# Altium PCB Pet_Feeder_PCB.PcbDoc (part 1 of 3)
Units mil, origin at the board's own origin, x right, y up, seen from the top; angles counter-clockwise.
Board outline 3600 x 2700 mil, 2 copper layers (Top Layer, Bottom Layer); 99 components, 71 nets, 320 pads, 396 vias.
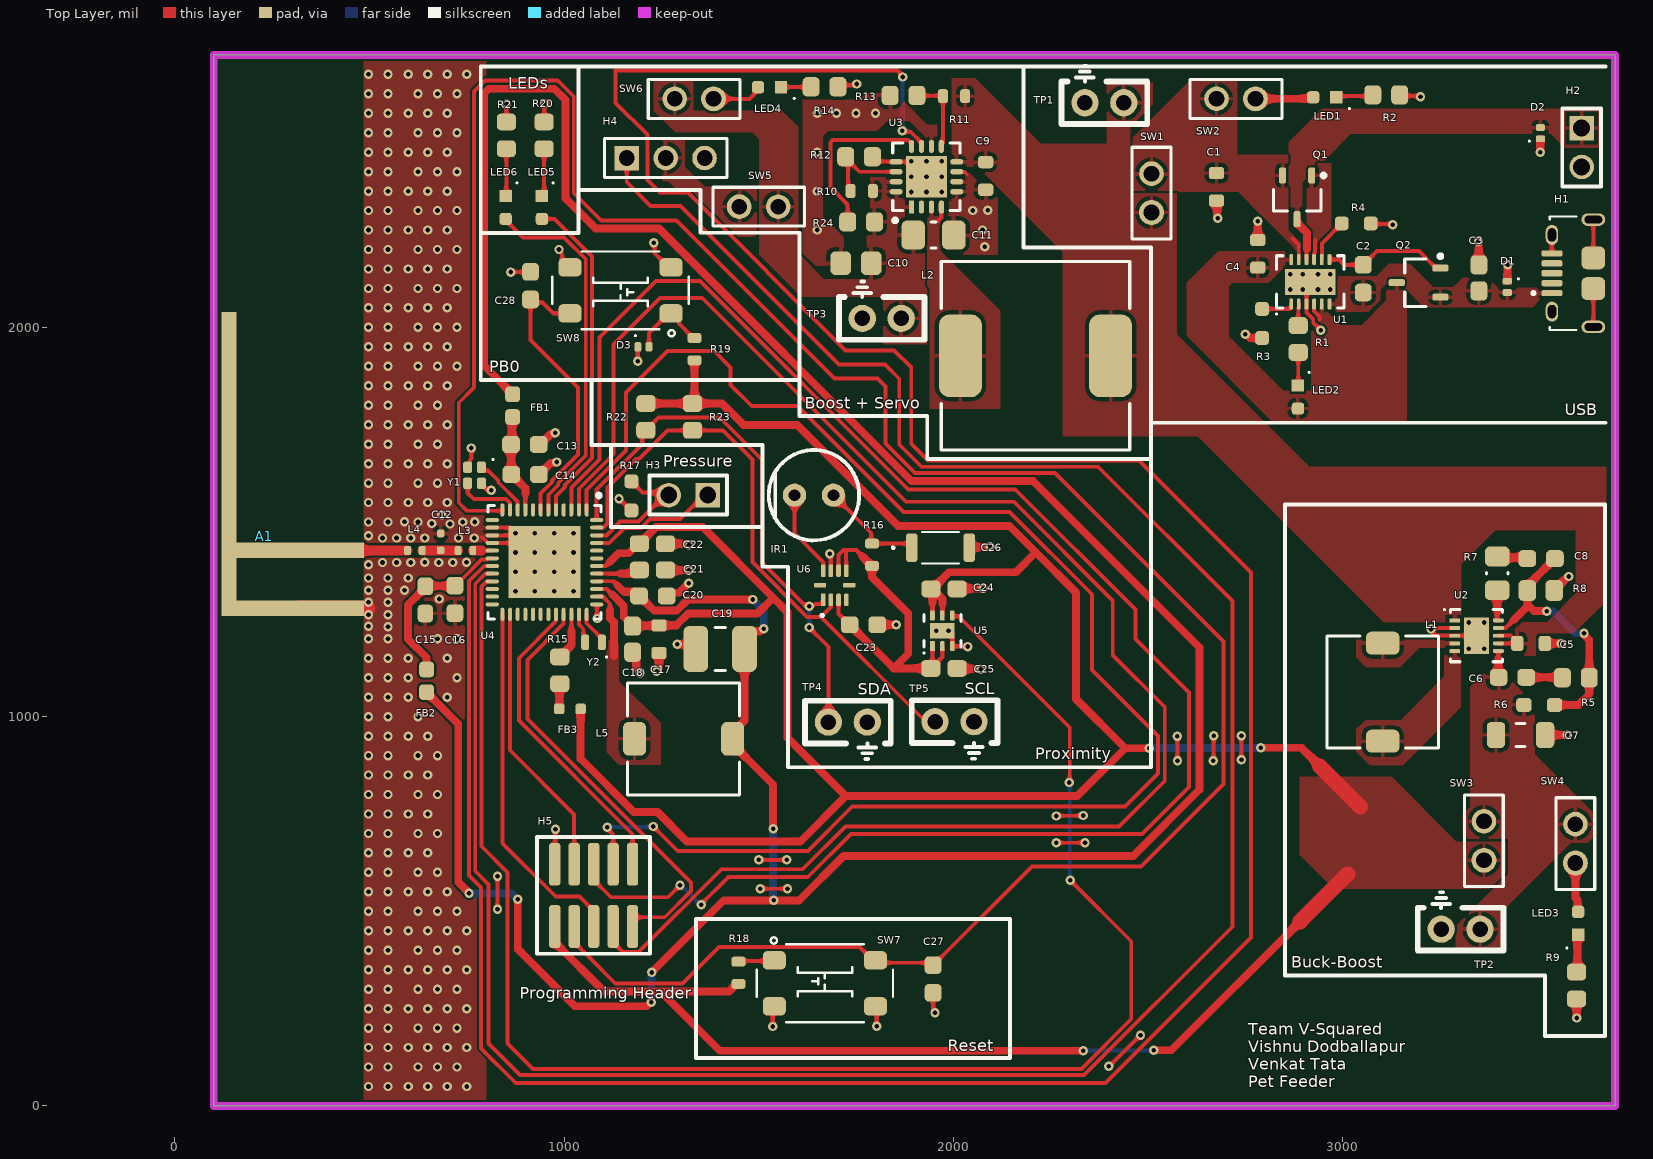
[diagram p0: Top Layer view]
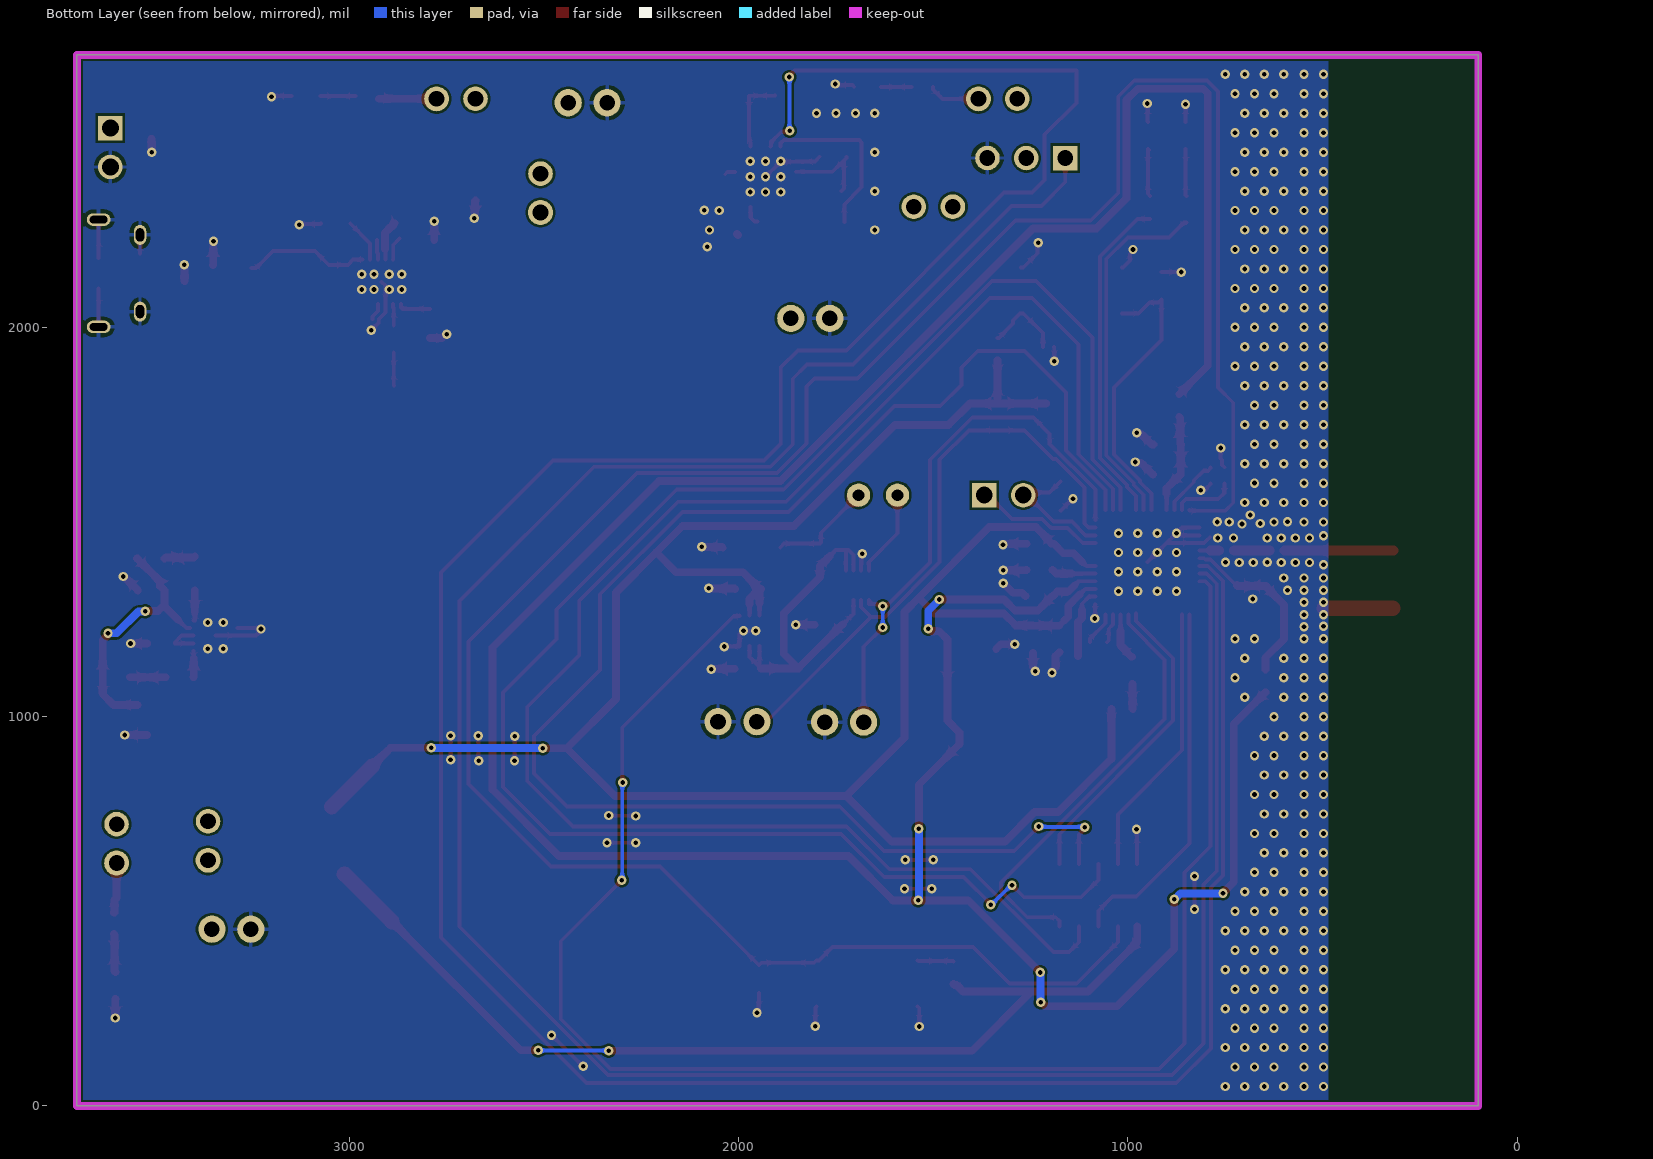
[diagram p1: Bottom Layer view, seen from below]
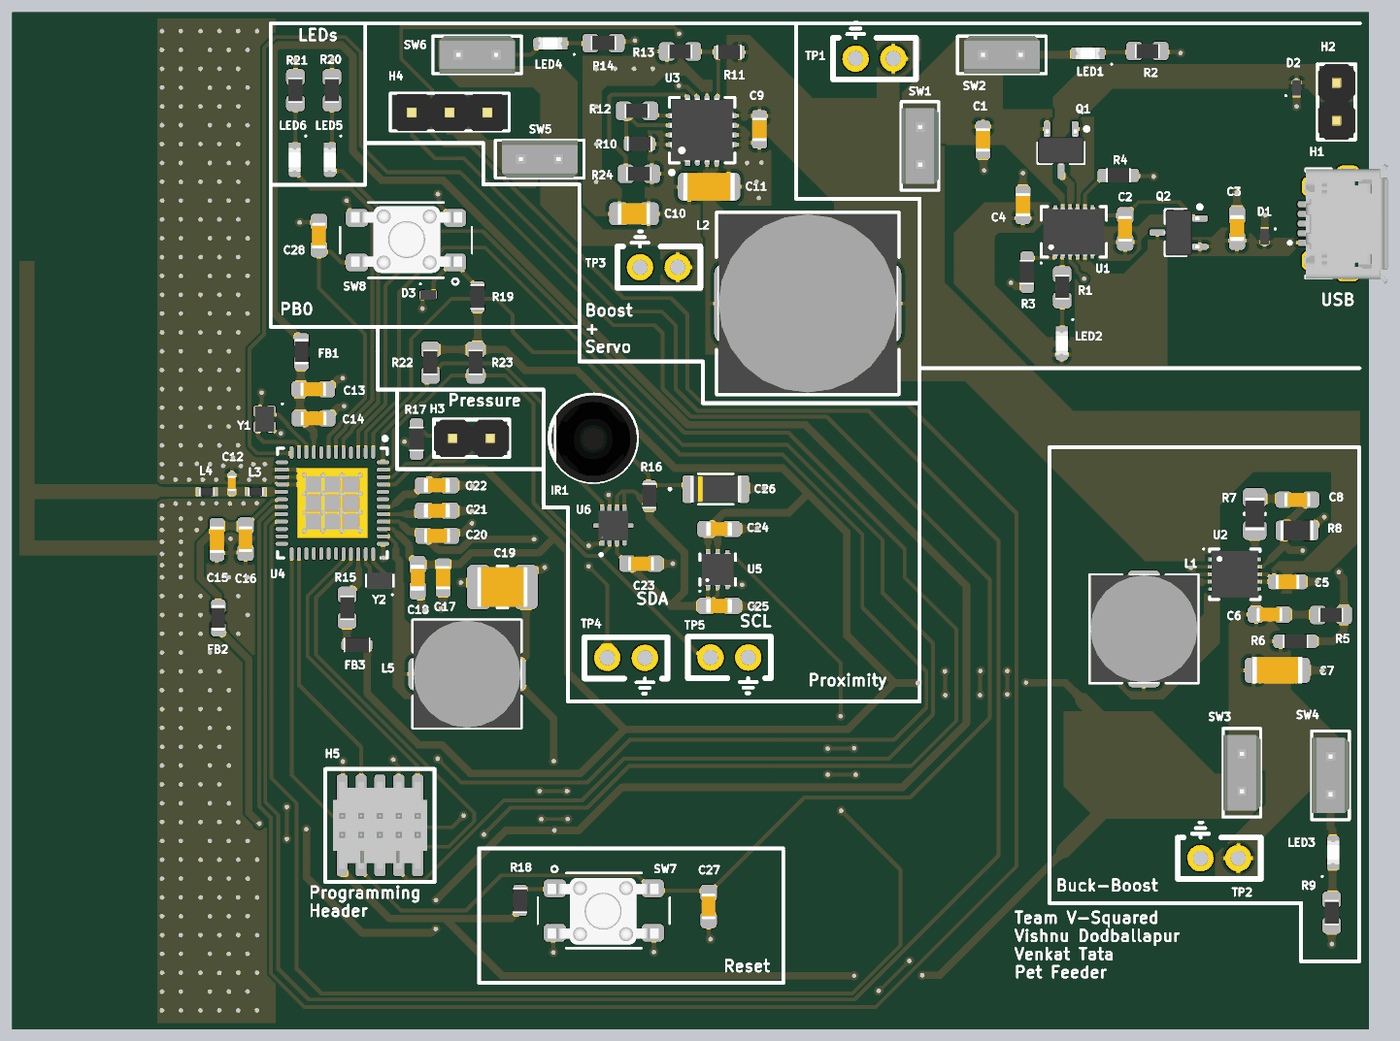
[diagram p3: 3D render of the assembled board from above, using the file's embedded part models]

## Layer stack, top to bottom
Top Solder: solder mask 0.4, Solder Resist, Dk 3.5
Top Layer: signal copper 1.4
Dielectric 1: dielectric 12.6, FR-4, Dk 4.8
Bottom Layer: signal copper 1.4
Bottom Solder: solder mask 0.4, Solder Resist, Dk 3.5

## Board outline
100,0 100,2700 3700,2700 3700,0

## Design rules (kind name [scope] priority, off if disabled: settings)
Clearance [All] p1: gap=6 ignorepadtopadclearanceinfootprint=TRUE except(0: Arc-Hole Track-Hole SMDPad-Hole THPad-Hole Via-Hole Fill-Hole Poly-Hole Region-Hole Text-Hole)
Height [All] p1: minheight=0 maxheight=1100 prefheight=500
PlaneConnect [All] p1: planeconnectstyle=Direct reliefexpansion=20 reliefentries=4 reliefconductorwidth=10 reliefairgap=10
PolygonConnect ANT_Rule [HasFootprint('F_ANT')] p1: connectstyle=Direct reliefconductorwidth=10 reliefentries=4 polygonreliefangle="90 Angle" airgapwidth=10
PolygonConnect [All] p2: thpad.connectstyle=Relief thpad.reliefconductorwidth=10 thpad.reliefentries=4 thpad.polygonreliefangle="90 Angle" thpad.airgapwidth=10 smdpad.connectstyle=Relief smdpad.reliefconductorwidth=10 smdpad.reliefentries=4 smdpad.polygonreliefangle="90 Angle" smdpad.airgapwidth=10 via.connectstyle=Direct via.reliefconductorwidth=10 via.reliefentries=4 via.polygonreliefangle="90 Angle" via.airgapwidth=10
RoutingVias [All] p1: holewidth=12 width=24 viastyle="Through Hole" minholewidth=12 minwidth=24 maxholewidth=25 maxwidth=50
ShortCircuit ANT_Short_Circuit [InNet('GND') vs InNet('NetA1_FEED')] p1: allowed=TRUE
ShortCircuit [All] p2: allowed=FALSE
SolderMaskExpansion [All] p1: expansion=4 istentingtop=FALSE
Width [OnLayer('Top Overlay')] p1: maxlimit=10 minlimit=6 preferedwidth=6 minimp=50.000000 maximp=50.000000 favimp=50.000000
Width PWR_Width [InNet('+3V3_AVDD') OR InNet('+3V3_PAVDD') OR InNet('+3V3_RFVDD') OR InNet('+3V3_V_DCDC') OR InNet('+3V3_V_MCU') OR InNet('+3V3_V_MCU_OUT') OR InNet('+3V3_V_PX') OR InNet('+3V7_V_BAT') OR InNet('+3V7_V_BOOST') OR InNet('+3V7_V_BOOST_IN') OR InNet('+3V7_V_LOAD') OR InNet('+3V7_V_LOAD_OUT') OR InNet('+5V0_USB') OR InNet('+5V0_USB_IN') OR InNet('+5V0_V_SERVO') OR InNet('+5V0_V_SERVO_OUT')] p2: maxlimit=100 minlimit=10 preferedwidth=20 minimp=50.000000 maximp=50.000000 favimp=50.000000
Width Default_Width [All] p3: maxlimit=40 minlimit=6 preferedwidth=10 minimp=50.000000 maximp=50.000000 favimp=50.000000
27 further rules are at their usual default settings.

## Classes and differential pairs
component class Power_Circuit_Schematic: C5 C6 C7 C8 C9 C10 C11 L1 L2 LED3 LED4 R5 R6 R7 R8 R9 R10 R11 R12 R13 R14 R24 SW3 SW4 SW5 SW6 TP2 TP3 U2 U3
component class Peripheral_Schematic: C23 C24 C25 C26 C27 C28 D3 H3 H4 IR1 LED5 LED6 R16 R17 R18 R19 R20 R21 SW7 SW8 TP4 TP5 U5 U6
component class BG_PWR_Radio_Schematic: A1 C12 C13 C14 C15 C16 C17 C18 C19 C20 C21 C22 FB1 FB2 FB3 L3 L4 L5 R15 U4 Y1
component class BG_IO_Programming_Schematic: H5 R22 R23 Y2
component class Battery_PMIC: C1 C2 C3 C4 D1 D2 H1 H2 LED1 LED2 Q1 Q2 R1 R2 R3 R4 SW1 SW2 TP1 U1

## Components (designator, comment, footprint, x,y, rotation, side; value= is the part's Value field where it differs from the comment)
A1 "2.4GHz F Antenna" F_ANT 486,1258 r90 top net-tie
C1 "10 µF ±20%" CAPC0603X10N-M 2676,2361 r270 top
C2 "10nF" CAPC0603X09N 3053,2125 r90 top
C3 "1 µF" CAPC0603X10N 3350,2127 r90 top
C4 "10 µF ±20%" CAPC0603X10N-M 2782,2189 r90 top
C5 "10 µF ±20%" CAPC0603X10N-M 3484,1188 r0 top
C6 "47 pF" CAPC0603X09N 3436,1101 r0 top
C7 "22 µF ±10% 1206" CAPC1206X18N 3457,953 r0 top
C8 "220 pF" CAPC0603X09N 3510,1406 r180 top
C9 "10 µF ±20%" CAPC0603X10N-M 2083,2389 r270 top
C10 "2.2 µF 0805" CAPC0805X12N 1750,2165 r180 top
C11 "220 µF ±20% 6.3V 1206" CAPC1206X19N 1949.17,2237 r0 top
C12 "1.5 pF ±5% 50V 0402" CAPC0402X06N 683,1449 r90 top
C13 "100 pF" CAPC0603X09N 899.12,1699.06 r0 top
C14 "10 pF" CAPC0603X09N 900,1622 r0 top
C15 "0.22 µF" CAPC0603X10N-Y 643.73,1299.84 r270 top
C16 "10nF" CAPC0603X09N 719.57,1301.24 r270 top
C17 "10 µF ±20%" CAPC0603X10N-M 1244,1199 r270 top
C18 "1 µF" CAPC0603X10N 1176,1199 r270 top
C19 "4.7 µF 25V 1210" CAPC1210X17N 1401,1174 r180 top
C20 "0.1 µF" CAPC0603X09N 1228,1310 r0 top
C21 "1 µF" CAPC0603X10N 1227,1377 r0 top
C22 "1 µF" CAPC0603X10N 1227,1444 r0 top
C23 "0.1 µF" CAPC0603X09N 1769,1236 r180 top
C24 "1 µF" CAPC0603X10N 1976,1328 r0 top
C25 "1 µF" CAPC0603X10N 1976,1124 r0 top
C26 "15 µF ±20% 1206" CAP_1206_TDK-M 1967,1434 r0 top
C27 "10nF" CAPC0603X09N 1948,326 r270 top
C28 "10nF" CAPC0603X09N 914,2107 r90 top
D1 "ESD" DFN65P100X26-2N 3423,2104 r270 top
D2 "ESD" DFN65P100X26-2N 3508,2499 r90 top
D3 "ESD" DFN65P100X26-2N 1204,1950 r0 top
FB1 "FERRITE BEAD 600 OHM 0603 1LN" BLM18AG601SN1D 868,1799 r270 top
FB2 "FERRITE BEAD 600 OHM 0603 1LN" BLM18AG601SN1D 647,1092 r90 top
FB3 "1 kOhms @ 100 MHz" INDC0603X10N 1015,1020 r180 top
H1 "USB MICRO B RECPT" MICROUSB_AMPHENOL_10118194-0001LF 3644,2139 r90 top
H2 "0.1\" Header" 2_PIN_100MIL 3614,2462 r270 top
H3 "0.1\" Header" 2_PIN_100MIL 1319,1569 r180 top
H4 "0.1\" Header" "3-PIN_MALE_HEADER_01-IN - duplicate" 1261,2435 r0 top
H5 "10-pin 0.05\" Header" FTSH-105-01-XXX-DV-K 1076,541 r0 top
IR1 "IR LED" LED_THROUGH-HOLE 1642,1569 r180 top
L1 "4.7 µH 2.5 A 30mOhm Max" INDP7272X45N 3103,1063 r270 top
L2 "6.8UH 4.9A 23 mOhm" INDP120120X45N 2211,1927 r180 top
L3 "1.9 nH 0402" INDC0402X04N 746.73,1426.84 r180 top
L4 "1.9 nH 0402" INDC0402X04N 616.73,1426.84 r180 top
L5 "4.7 µH 2.5 A 30mOhm Max" INDP7272X45N 1307,943 r0 top
LED1 "RED 0603" DIOC0603X06N 2954,2591 r0 top
LED2 "RED 0603" DIOC0603X06N 2885,1821 r90 top
LED3 "RED 0603" DIOC0603X06N 3605,469 r270 top
LED4 "RED 0603" DIOC0603X06N 1528,2617 r0 top
LED5 "RED 0603" DIOC0603X06N 943,2308 r90 top
LED6 "RED 0603" DIOC0603X06N 850,2308 r90 top
Q1 "P-Channel FET" SOT95P300X115-3N#1 2883,2334 r270 top
Q2 "P-Channel FET" SOT95P300X115-3N#2 3195,2115 r180 top
R1 "64.9 Ohms" RESC0603X05N 2886,1970 r90 top
R2 "64.9 Ohms" RESC0603X05N 3112,2597 r180 top
R3 "2 kOhms" RESC0603X05N-1 2793,2010 r270 top
R4 "2 kOhms" RESC0603X05N-1 3035,2267 r0 top
R5 "6.49 kOhms" RESC0603X05N 3599,1100 r180 top
R6 "1 MOhms" RESC0603X06N-BB 3505,1030 r180 top
R7 "49.9 kOhms 0805" RESC0805X05N 3397,1368 r90 top
R8 "221 kOhms 0805" RESC0805X06N 3509,1324 r180 top
R9 "47 Ohms" RESC0603X06N 3601,309.45 r90 top
R10 "1.62 MOhms 0.1W" RESC0603X05N-2 1764.8,2350.24 r0 top
R11 "2.4 MOhms 0.1W" RESC0603X05N-2 2001.93,2594.07 r0 top
R12 "180 kOhms" RESC0603X05N 1757.8,2438.24 r0 top
R13 "390 kOhms" RESC0603X05N 1872,2595.91 r0 top
R14 "47 Ohms" RESC0603X06N 1669,2618 r180 top
R15 "1 Ohms" RESC0603X05N 989,1119 r90 top
R16 "30 Ohms" RESC0603X05N-2 1791,1416 r270 top
R17 "2 kOhms" RESC0603X05N-1 1173,1567 r90 top
R18 "1 kOhms" RESC0603X05N-2 1448,342 r270 top
R19 "1 kOhms" RESC0603X05N-2 1335,1944 r270 top
R20 "47 Ohms" RESC0603X06N 948.78,2493.2 r270 top
R21 "47 Ohms" RESC0603X06N 851.78,2493.2 r270 top
R22 "10 kOhms 0.333W" RESC0603X06N 1210,1770 r90 top
R23 "10 kOhms 0.333W" RESC0603X06N 1330,1770 r90 top
R24 "10 kOhms 0.333W" RESC0603X06N 1763,2271 r0 top
SW1 "0.1\" Connector" 2PIN-HEADER-CONN 2509,2395 r270 top
SW2 "0.1\" Connector" 2PIN-HEADER-CONN 2676,2587 r0 top
SW3 "0.1\" Connector" 2PIN-HEADER-CONN 3363,731 r270 top
SW4 "0.1\" Connector" 2PIN-HEADER-CONN 3598,724 r270 top
SW5 "0.1\" Connector" 2PIN-HEADER-CONN 1550,2310 r180 top
SW6 "0.1\" Connector" 2PIN-HEADER-CONN 1284,2587 r0 top
SW7 "Tactile Switch SPST-NO" Switch 1670,315 r0 top
SW8 "Tactile Switch SPST-NO" Switch 1145,2095 r180 top
TP1 "10x Probe TP" TP10X_PROBE 2388,2577 r180 top
TP2 "10x Probe TP" TP10X_PROBE 3303,454 r180 top
TP3 "10x Probe TP" TP10X_PROBE 1816,2023 r180 top
TP4 "10x Probe TP" TP10X_PROBE 1729,986 r0 top
TP5 "10x Probe TP" TP10X_PROBE 2003,987 r0 top
U1 "LTC4067EDE#TRPBF" SON50P300X80_HS-13N 2917,2117 r90 top
U2 "LTC3536EDD#TRPBF" SON50P300X80_HS-11N 3344,1208 r0 top
U3 "TPS61032RSAR" QFN65P400X400X100_HS-17N 1931,2387 r90 top
U4 "EFR32BG13P732F512GM48-D" 48-QFN_7X7 949.79,1396.94 r270 top
U5 "Load Switch" SON65P200X60_HS-7N 1972,1220.37 r90 top
U6 "SI1141-A11-GMR" QFN10_2X2_SIL 1695.16,1337.41 r90 top
Y1 "Crystal 38.4MHz" DFN105P160X40-4N 770,1620 r270 top
Y2 "32.768kHz Crystal" DFN153P160X50-2N 1075.65,1191 r180 top

## Footprints (in the part's own frame and the unit in brackets; to place one, negate y for a bottom-side part, rotate by r counter-clockwise, add the part's x,y. Pads: shape width x height; smd on the part's side, far side on the other; paste and mask are expansions set on the pad)
2_PIN_100MIL [mm]
  rect 1.6x1.6 hole 1.1: 1(-1.27,0)
  round 1.6 hole 1.1: 2(1.27,0)
  silkscreen extent -2.54,-1.27 2.54,1.27, body extent -2.54,-1.27 2.54,1.27, height 8.54
2PIN-HEADER-CONN [mm]
  round 1.6 hole 1.02: 1(0,0)
  round 1.62 hole 1.02: 2(2.54,0)
  silkscreen extent -1.72,-1.27 4.26,1.26, body extent -1.27,-1.27 3.81,1.27, height 8.13
"3-PIN_MALE_HEADER_01-IN - duplicate" [mm] ".025 SQ Post Terminal Strip Assembly, 1x3 Pins, Vertical, 2.54mm Pitch, Male"
  rect 1.6x1.6 hole 1.02: 1(-2.54,0)
  round 1.6 hole 1.02: 2(0,0) 3(2.54,0)
  silkscreen extent -4,-1.27 4,1.27, body extent -3.81,-1.27 3.81,1.22, height 8.54
48-QFN_7X7 [mm] "QFN, 48-Leads, Body 7.00x7.00mm, Pitch 0.50mm, Thermal Pad 4.70x4.70mm, IPC Medium Density"
  oval 0.86x0.26 smd mask+0.064: 1(-3.405,2.75) 2(-3.405,2.25) 3(-3.405,1.75) 4(-3.405,1.25) 5(-3.405,0.75) 6(-3.405,0.25) 7(-3.405,-0.25) 8(-3.405,-0.75) 9(-3.405,-1.25) 10(-3.405,-1.75) 11(-3.405,-2.25) 12(-3.405,-2.75) 25(3.405,-2.75) 26(3.405,-2.25) 27(3.405,-1.75) 28(3.405,-1.25) 29(3.405,-0.75) 30(3.405,-0.25) 31(3.405,0.25) 32(3.405,0.75) 33(3.405,1.25) 34(3.405,1.75) 35(3.405,2.25) 36(3.405,2.75)
  oval 0.26x0.86 smd mask+0.064: 13(-2.75,-3.405) 14(-2.25,-3.405) 15(-1.75,-3.405) 16(-1.25,-3.405) 17(-0.75,-3.405) 18(-0.25,-3.405) 19(0.25,-3.405) 20(0.75,-3.405) 21(1.25,-3.405) 22(1.75,-3.405) 23(2.25,-3.405) 24(2.75,-3.405) 37(2.75,3.405) 38(2.25,3.405) 39(1.75,3.405) 40(1.25,3.405) 41(0.75,3.405) 42(0.25,3.405) 43(-0.25,3.405) 44(-0.75,3.405) 45(-1.25,3.405) 46(-1.75,3.405) 47(-2.25,3.405) 48(-2.75,3.405)
  rect 4.7x4.7 smd paste-3 mask+0.064: 49(0,0)
  silkscreen extent -4.47,-3.7 3.7,3.7, body extent -3.55,-3.55 3.55,3.55, height 0.9
BLM18AG601SN1D [mm] "FERRITE BEAD 600 OHM 0603 1LN"
  rrect50% 1.02x0.98 smd mask+0.064: 1(-0.74,0) 2(0.74,0)
  body extent -0.87,-0.47 0.88,0.48, height 0.95
CAP_1206_TDK-M [mil]
  rrect50% 29.65x72.97 smd paste+0 mask+2.5: 1(-73.83,0) 2(73.83,0)
  silkscreen extent -125,-40 47,40, body extent -67,-36 67,36, height 49
CAPC0402X06N [mm] "Chip Capacitor, 2-Leads, Body 1.00x0.50mm, IPC Medium Density"
  rrect50% 0.5x0.5 smd mask+0.064: 1(-0.55,0) 2(0.55,0)
  body extent -0.53,-0.28 0.53,0.28, height 0.55
CAPC0603X09N [mm] "Chip Capacitor, 2-Leads, Body 1.60x0.80mm, IPC Medium Density"
  rrect50% 1.15x1.1 smd mask+0.064: 1(-0.9,0) 2(0.9,0)
  body extent -0.87,-0.48 0.87,0.48, height 0.92
CAPC0603X10N [mm] "Chip Capacitor, 2-Leads, Body 1.60x0.80mm, IPC Medium Density"
  rrect50% 1.25x1.1 smd mask+0.064: 1(-0.85,0) 2(0.85,0)
  body extent -0.88,-0.48 0.88,0.48, height 0.95
CAPC0603X10N-M [mm] "Chip Capacitor, 2-Leads, Body 1.50x0.80mm, IPC Medium Density"
  rrect50% 0.8x1 smd mask+0.064: 1(-0.9,0) 2(0.9,0)
  body extent -0.8,-0.5 0.8,0.5, height 1
CAPC0603X10N-Y [mm] "Chip Capacitor, 2-Leads, Body 1.60x0.80mm, IPC Medium Density"
  rrect50% 1.15x1 smd mask+0.064: 1(-0.889,0) 2(0.889,0)
  body extent -0.9,-0.5 0.9,0.5, height 1
CAPC0805X12N [mm] "Chip Capacitor, 2-Leads, Body 2.00x1.25mm, IPC Medium Density"
  rrect50% 1.35x1.55 smd mask+0.064: 1(-1,0) 2(1,0)
  body extent -1.1,-0.72 1.1,0.72, height 1.2
CAPC1206X18N [mm] "Chip Capacitor, 2-Leads, Body 3.20x1.60mm, IPC Medium Density"
  rrect50% 1.2x1.7 smd mask+0.064: 1(-1.6,0) 2(1.6,0)
  silkscreen extent -0.3,-0.75 0.3,0.75, body extent -1.7,-0.9 1.7,0.9, height 1.8
CAPC1206X19N [mm] "Chip Capacitor, 2-Leads, Body 3.20x1.60mm, IPC Medium Density"
  rrect50% 1.55x1.9 smd mask+0.064: 1(-1.325,0) 2(1.325,0)
  silkscreen extent -0.15,-0.85 0.15,0.85, body extent -1.75,-0.95 1.75,0.95, height 1.9
CAPC1210X17N [mm] "Chip Capacitor, 2-Leads, Body 3.20x2.50mm, IPC Medium Density"
  rrect50% 1.62x3.01 smd mask+0.064: 1(-1.59,0) 2(1.59,0)
  silkscreen extent -0.35,-1.4 0.35,1.41, body extent -1.7,-1.35 1.7,1.35, height 1.7
DFN65P100X26-2N [mm] "DFN, 2-Leads, Body 0.60x1.00mm, Pitch 0.65mm, IPC Medium Density"
  rrect50% 0.45x0.6 smd mask+0.064: 1(-0.365,0) 2(0.365,0)
  silkscreen extent -0.57,0.68 -0.48,0.77, body extent -0.53,-0.33 0.53,0.33, height 0.26
DFN105P160X40-4N [mm] "DFN, 4-Leads, Body 1.20x1.60mm, Pitch 1.05mm, IPC Medium Density"
  rrect50% 0.75x0.6 smd mask+0.064: 1(-0.525,0.45) 2(-0.525,-0.45) 3(0.525,-0.45) 4(0.525,0.45)
  silkscreen extent -1.07,1.15 -0.98,1.25, body extent -0.85,-0.65 0.92,0.65, height 0.4
DFN153P160X50-2N [mm] "DFN, 2-Leads, Body 1.00x1.60mm, Pitch 1.53mm, IPC Medium Density"
  rrect50% 0.5x1 smd mask+0.064: 1(-0.55,0) 2(0.55,0)
  silkscreen extent -0.9,0.9 -0.8,1, body extent -0.99,-0.55 0.99,0.55, height 0.5
DIOC0603X06N [mm] "Chip Diode, 2-Leads, Body 1.60x0.80mm, IPC Medium Density"
  rrect50% 0.8x0.8 smd mask+0.064: A(-0.75,0)
  rect 0.8x0.8 smd mask+0.064: C(0.75,0)
  silkscreen extent 1.56,-0.79 1.66,-0.69, body extent -0.8,-0.4 0.8,0.4, height 0.8
F_ANT [mil]
  rect 40x329 smd paste-1000 mask+0: FEED(169,164.5) GND(20,164.5)
  rect 782x39 smd paste-1000 mask+0: FEED(391,346.5)
FTSH-105-01-XXX-DV-K [mil]
  rrect50% 29x110 smd mask+2.52: 1(-100,-80) 2(-100,80) 3(-50,-80) 4(-50,80) 5(0,-80) 6(0,80) 7(50,-80) 8(50,80) 9(100,-80) 10(100,80)
  silkscreen extent -145,-150 145,150, body extent -125,-115 125,115, height 241
INDC0402X04N [mm] "Chip Inductor, 2-Leads, Body 1.00x0.50mm, IPC Medium Density"
  rrect50% 0.45x0.6 smd mask+0.064: 1(-0.475,0) 2(0.475,0)
  body extent -0.53,-0.28 0.53,0.28, height 0.37
INDC0603X10N [mm] "Chip Inductor, 2-Leads, Body 1.60x0.80mm, IPC Medium Density"
  rrect50% 0.7x0.7 smd mask+0.064: 1(-0.7,0) 2(0.7,0)
  body extent -0.9,-0.5 0.9,0.5, height 1
INDP7272X45N [mm] "Precision Wire Wound Inductor, 2-Leads, Body 7.20x7.20mm, IPC Medium Density"
  rrect50% 1.5x2.2 smd mask+0.064: 1(-3.2,0) 2(3.2,0)
  silkscreen extent -3.65,-3.65 3.65,3.65, body extent -3.7,-3.6 3.7,3.6, height 4.6
INDP120120X45N [mm] "Precision Wire Wound Inductor, 2-Leads, Body 12.00x12.00mm, IPC Medium Density"
  rrect50% 2.8x5.4 smd mask+0.064: 1(-4.9,0) 2(4.9,0)
  silkscreen extent -6.15,-6.15 6.15,6.15, body extent -6.1,-6 6.1,6, height 4.6
LED_THROUGH-HOLE [mil]
  round 60 hole 30: 1(-50,0) 2(50,0)
  silkscreen extent -116,-116 116,116, body extent -116,-114 98,118, height 350
MICROUSB_AMPHENOL_10118194-0001LF [mm]
  rrect50% 0.4x1.35 smd: 1(-1.3,2.7) 2(-0.65,2.7) 3(0,2.7) 4(0.65,2.7) 5(1.3,2.7)
  oval 1.3x0.813 hole 0.55 slot 0.85 at 0 deg: S1(-2.5,2.7) S2(2.5,2.7)
  oval 0.813x1.55 hole 0.5 slot 1.15 at 90 deg: S3(-3.5,0) S6(3.5,0)
  rrect50% 1.5x1.55 smd: S4(-1,0) S5(1,0)
  silkscreen extent -3.7,1.09 3.7,4.01, body extent -4.05,-2.69 4,2.89, height 2.75
QFN10_2X2_SIL [mm]
  rect 0.8x0.3 smd paste+0 mask+0.064: 1(-0.95,0.75)
  rrect50% 0.8x0.3 smd paste+0 mask+0.064: 2(-0.95,0.25) 3(-0.95,-0.25) 4(-0.95,-0.75) 6(0.95,-0.75) 7(0.95,-0.25) 8(0.95,0.25) 9(0.95,0.75)
  rrect50% 0.3x0.8 smd paste+0 mask+0.064: 5(0,-0.95) 10(0,0.95)
  silkscreen extent -2.02,0.77 -1.92,0.87, body extent -1,-1 1,1, height 0.76
QFN65P400X400X100_HS-17N [mm] "QFN, 16-Leads, Body 4.00x4.00mm, Pitch 0.65mm, Thermal Pad 2.70x2.70mm, IPC Medium Density"
  rect 0.85x0.35 smd mask+0.064: 1(-1.975,0.975)
  oval 0.85x0.35 smd mask+0.064: 2(-1.975,0.325) 3(-1.975,-0.325) 4(-1.975,-0.975) 9(1.975,-0.975) 10(1.975,-0.325) 11(1.975,0.325) 12(1.975,0.975)
  oval 0.35x0.85 smd mask+0.064: 5(-0.975,-1.975) 6(-0.325,-1.975) 7(0.325,-1.975) 8(0.975,-1.975) 13(0.975,1.975) 14(0.325,1.975) 15(-0.325,1.975) 16(-0.975,1.975)
  rect 2.7x2.7 smd paste-4 mask+0.064: 17(0,0)
  silkscreen extent -2.97,-2.2 2.2,2.2, body extent -2.13,-2.13 2.13,2.13, height 1
RESC0603X05N [mm] "Chip Resistor, 2-Leads, Body 1.58x0.85mm, IPC Medium Density"
  rrect50% 1.1x1.25 smd mask+0.064: 1(-0.875,0) 2(0.875,0)
  body extent -0.82,-0.48 0.82,0.48, height 0.5
RESC0603X05N-1 [mm] "Chip Resistor, 2-Leads, Body 1.58x0.85mm, IPC Medium Density"
  rrect50% 0.9x0.9 smd mask+0.064: 1(-0.95,0) 2(0.95,0)
  body extent -0.82,-0.48 0.82,0.48, height 0.5
RESC0603X05N-2 [mm] "Chip Resistor, 2-Leads, Body 1.55x0.80mm, IPC Medium Density"
  rrect50% 0.65x0.9 smd mask+0.064: 1(-0.725,0) 2(0.725,0)
  body extent -0.85,-0.48 0.85,0.48, height 0.5
RESC0603X06N [mm] "Chip Resistor, 2-Leads, Body 1.60x0.85mm, IPC Medium Density"
  rrect50% 1.1x1.25 smd mask+0.064: 1(-0.875,0) 2(0.875,0)
  body extent -0.85,-0.48 0.85,0.48, height 0.55
RESC0603X06N-BB [mm] "Chip Resistor, 2-Leads, Body 1.60x0.80mm, IPC Medium Density"
  rrect50% 1x0.9 smd mask+0.064: 1(-1,0) 2(1,0)
  body extent -0.85,-0.45 0.85,0.45, height 0.55
RESC0805X05N [mm] "Chip Resistor, 2-Leads, Body 2.05x1.20mm, IPC Medium Density"
  rrect50% 1.3x1.6 smd mask+0.064: 1(-1.1,0) 2(1.1,0)
  silkscreen extent -0.05,-0.7 0.05,0.7, body extent -1.1,-0.65 1.1,0.65, height 0.5
RESC0805X06N [mm] "Chip Resistor, 2-Leads, Body 2.00x1.25mm, IPC Medium Density"
  rrect50% 1.15x1.35 smd mask+0.064: 1(-0.875,0) 2(0.875,0)
  body extent -1.1,-0.67 1.1,0.67, height 0.6
SON50P300X80_HS-11N [mm] "SON, 10-Leads, Body 3.00x3.00mm, Pitch 0.50mm, Thermal Pad 1.60x0.69mm, IPC Medium Density"
  rect 0.7x0.25 smd mask+0.064: 1(-1.425,1)
  rrect50% 0.7x0.25 smd mask+0.064: 2(-1.425,0.5) 3(-1.425,0) 4(-1.425,-0.5) 5(-1.425,-1) 6(1.425,-1) 7(1.425,-0.5) 8(1.425,0) 9(1.425,0.5) 10(1.425,1)
  rect 1.65x2.38 smd paste-4 mask+0.064: 11(0,0)
  silkscreen extent -2.15,-1.7 1.7,1.75, body extent -1.6,-1.55 1.6,1.55, height 0.8
SON50P300X80_HS-13N [mm] "SON, 12-Leads, Body 4.00x3.00mm, Pitch 0.50mm, Thermal Pad 1.60x0.69mm, IPC Medium Density"
  rect 0.7x0.25 smd mask+0.064: 1(-1.45,1.25)
  rrect50% 0.7x0.25 smd mask+0.064: 2(-1.45,0.75) 3(-1.45,0.25) 4(-1.45,-0.25) 5(-1.45,-0.75) 6(-1.45,-1.25) 7(1.45,-1.25) 8(1.45,-0.75) 9(1.45,-0.25) 10(1.45,0.25) 11(1.45,0.75) 12(1.45,1.25)
  rect 1.7x3.3 smd paste-4 mask+0.064: 13(0,0)
  silkscreen extent -2.15,-2.2 1.7,2.25, body extent -1.6,-2.05 1.6,2.05, height 0.8
SON65P200X60_HS-7N [mm] "SON, 6-Leads, Body 2.00x2.00mm, Pitch 0.65mm, Thermal Pad 1.60x0.63mm, IPC Medium Density"
  rect 0.65x0.3 smd mask+0.064: 1(-1,0.65)
  rrect50% 0.65x0.3 smd mask+0.064: 2(-1,0) 3(-1,-0.65) 4(1,-0.65) 5(1,0) 6(1,0.65)
  rect 1x1.6 smd paste-1 mask+0.064: 7(0,0)
  silkscreen extent -1.5,-1.2 1.05,1.25, body extent -1.07,-1.05 1.07,1.05, height 0.6
SOT95P300X115-3N#1 [mm] "SOT23, 3-Leads, Body 3.10x3.00mm, Pitch 0.95mm, IPC Medium Density"
  rrect50% 1.05x0.45 smd mask+0.064: 1(-1.425,0.95) 2(-1.425,-0.95) 3(1.425,0)
  silkscreen extent -1.55,-1.55 0.9,1.85, body extent -1.4,-1.55 1.4,1.55, height 1.15
SOT95P300X115-3N#2 [mm] "SOT23, 3-Leads, Body 3.10x3.00mm, Pitch 0.95mm, IPC Medium Density"
  rrect50% 1.05x0.45 smd mask+0.064: 1(-1.425,-0.95) 2(-1.425,0.95) 3(1.425,0)
  silkscreen extent -1.55,-1.85 0.9,1.55, body extent -1.4,-1.55 1.4,1.55, height 1.15
Switch [mm]
  rrect50% 1.5x1.2 smd mask+0.064: 1(-3.3,1.5) 2(3.3,1.5) 3(-3.3,-1.5) 4(3.3,-1.5)
  silkscreen extent -4.44,-2.54 4.45,3, body extent -3.8,-2.29 3.7,2.21, height 3.7
TP10X_PROBE [mil] "Small Probs footprint"
  round 70 hole 40: 1(-50,0) 2(50,0)
  silkscreen extent -110,-95 110,55

## Part data
A1: library part F_ANT
C1 C4 C5 C9 C17: library part GRT188C81C106ME13D, "0603 10 uF 16 V ±20% Tolerance X6S Surface Mount Multilayer Ceramic Capacitor", Capacitance=10uF, Case Code (Imperial)=0603, Case Code (Metric)=1608, Manufacturer=Murata, Max Operating Temperature=105°C, Min Operating Temperature=-55°C, Ratings=AEC-Q200, Tolerance=20%, Voltage Rating=16V, Case/Package=0603, Category="Ceramic Capacitors", ComponentLink1Description=http://search.murata.co.jp/Ceramy/image/img/A01X/G101/ENG/GRT188C81C106ME13-01.pdf?src-supplier=Digi-Key, ComponentLink1URL=http://search.murata.co.jp/Ceramy/image/img/A01X/G101/ENG/GRT188C81C106ME13-01.pdf?src-supplier=Digi-Key, Length=0.063inch, Manufacturer Part Number=GRT188C81C106ME13D, Mount="Surface Mount", Packaging="Tape and Reel", Pricing 1="1=0.50000, 10=0.34800, 50=0.24380, 100=0.20890, 500=0.15666, 1000=0.13230 (USD)", RoHS=No, RoHS Compliant=No, Stock 1=8428, Supplier 1=Digi-Key, Thickness=0.035inch, Width=0.031inch
C2 C16 C27 C28: library part C0603C103J4RACTU, "Cap Ceramic 0.01uF 16V X7R 5% SMD 0603 125°C Paper T/R", Case Code (Imperial)=0603, Case Code (Metric)=1608, Dielectric=X7R, Dielectric Material=Ceramic, Manufacturer=KEMET, Max Operating Temperature=125°C, Min Operating Temperature=-55°C, Package Quantity=1, Tolerance=5%, Voltage Rating=16V, Capacitance=10nF, Case/Package=0603, Category="Ceramic Capacitors", ComponentLink1Description=https://datasheet.ciiva.com/5417/kem-c1002-x7r-smd-5417414.pdf?src-supplier=Mouser, ComponentLink1URL=https://datasheet.ciiva.com/5417/kem-c1002-x7r-smd-5417414.pdf?src-supplier=Mouser, Construction=Flat, Depth=0.8mm, Dissipation Factor=3.5%, Height=0.8mm, Lead Pitch=0.7mm, Length=1.6mm, Manufacturer Part Number=C0603C103J4RACTU, Mount="Surface Mount", Packaging="Tape and Reel", Pricing 1="1=0.35000, 10=0.24300, 50=0.16200, 100=0.13760, 500=0.09716, 1000=0.08501 (USD)", Radiation Hardening=No, REACH SVHC="No SVHC", RoHS=Yes, RoHS Compliant=Yes, Series=C, Stock 1=5301, Supplier 1=Digi-Key, Termination=SMD/SMT, Thickness=0.034inch, Voltage Rating (DC)=16V, Width=0.031inch
C3 C18 C21 C22 C24 C25: library part C0603X105J4RAC7867, "Cap Ceramic 1uF 16V X7R 5% SMD 0603 125°C Paper T/R", Capacitance=1uF, Case Code (Imperial)=0603, Case Code (Metric)=1608, Manufacturer=KEMET, Max Operating Temperature=125°C, Min Operating Temperature=-55°C, Tolerance=5%, Voltage Rating=16V, Case/Package=0603, Category="Ceramic Capacitors", ComponentLink1Description=https://api.kemet.com/component-edge/download/datasheet/C0603X105J4RAC7867.pdf?src-supplier=Digi-Key, ComponentLink1URL=https://api.kemet.com/component-edge/download/datasheet/C0603X105J4RAC7867.pdf?src-supplier=Digi-Key, Features="Soft Termination", Manufacturer Part Number=C0603X105J4RAC7867, Mount="Surface Mount", Packaging="Tape and Reel", Pricing 1="1=0.46000, 10=0.32200, 50=0.24340, 100=0.21210, 500=0.15708, 1000=0.13352 (USD)", RoHS=No, Stock 1=20000, Supplier 1=Digi-Key
C6: library part C0603C470J4GAC7867, "Cap Ceramic 47pF 16V C0G 5% SMD 0603 125°C Paper T/R", Capacitance=47pF, Case Code (Imperial)=0603, Case Code (Metric)=1608, Dielectric=C0G, Dielectric Material=Ceramic, Manufacturer=KEMET, Max Operating Temperature=125°C, Min Operating Temperature=-55°C, Tolerance=5%, Voltage Rating=16V, Case/Package=0603, Category="Ceramic Capacitors", ComponentLink1Description=http://components.arrow.com/part/dataview/0323_00323118?src-supplier=Arrow+Europe, ComponentLink1URL=http://components.arrow.com/part/dataview/0323_00323118?src-supplier=Arrow+Europe, ComponentLink2Description=http://capacitoredge.kemet.com/capedge2/DataSheet?pn=C0603C470J4GAC7867&src-supplier=Avnet+Europe, ComponentLink2URL=http://capacitoredge.kemet.com/capedge2/DataSheet?pn=C0603C470J4GAC7867&src-supplier=Avnet+Europe, ComponentLink3Description=https://api.kemet.com/component-edge/download/datasheet/C0603C470J4GACTU.pdf?src-supplier=Digi-Key, ComponentLink3URL=https://api.kemet.com/component-edge/download/datasheet/C0603C470J4GACTU.pdf?src-supplier=Digi-Key, ComponentLink4Description=http://capacitoredge.kemet.com/capedge2/DataSheet?pn=C0603C470J4GAC7867&src-supplier=Avnet, ComponentLink4URL=http://capacitoredge.kemet.com/capedge2/DataSheet?pn=C0603C470J4GAC7867&src-supplier=Avnet, Construction=Flat, Depth=0.8mm, Height=0.8mm, Lead Free="Lead Free", Length=1.6mm, Manufacturer Part Number=C0603C470J4GAC7867, Mount="Surface Mount", Packaging="Tape and Reel", Pricing 1="1=0.25000, 10=0.17400, 50=0.11580, 100=0.09840, 500=0.06944, 1000=0.06075 (USD)", Radiation Hardening=No, RoHS=Yes, RoHS Compliant=Yes, Series="SMD Comm C0G", Stock 1=19436, Supplier 1=Digi-Key, Voltage Rating (DC)=16V
C7: library part GRT31CC81C226KE01L, "1206 22 uF 16 V ±10% Tolerance X6S Multilayer Ceramic Capacitor", Capacitance=22uF, Case Code (Imperial)=1206, Case Code (Metric)=3216, Manufacturer=Murata, Max Operating Temperature=105°C, Min Operating Temperature=-55°C, Ratings=AEC-Q200, Tolerance=10%, Voltage Rating=16V, Case/Package=1206, Category="Ceramic Capacitors", ComponentLink1Description=http://search.murata.co.jp/Ceramy/image/img/A01X/G101/ENG/GRT31CC81C226KE01-01.pdf?src-supplier=Digi-Key, ComponentLink1URL=http://search.murata.co.jp/Ceramy/image/img/A01X/G101/ENG/GRT31CC81C226KE01-01.pdf?src-supplier=Digi-Key, Length=0.126inch, Manufacturer Part Number=GRT31CC81C226KE01L, Mount="Surface Mount", Packaging="Tape and Reel", Pricing 1="1=0.56000, 10=0.39500, 50=0.29880, 100=0.26020, 500=0.19272, 1000=0.16381 (USD)", RoHS=Yes, RoHS Compliant=Yes, Stock 1=62743, Supplier 1=Digi-Key, Thickness=0.071inch, Width=0.063inch
C8: library part C0603C221J4GAC7867, "Cap Cer 220PF 16V C0G/NP0 0603", Capacitance=220pF, Case/Package=0603, Dielectric=C0G, Dielectric Material=Ceramic, Manufacturer=KEMET, Max Operating Temperature=125°C, Min Operating Temperature=-55°C, Tolerance=5%, Voltage Rating (DC)=16V, Category="Ceramic Capacitors", ComponentLink1Description=http://components.arrow.com/part/dataview/0323_00318431?src-supplier=Arrow+Europe, ComponentLink1URL=http://components.arrow.com/part/dataview/0323_00318431?src-supplier=Arrow+Europe, ComponentLink2Description=http://capacitoredge.kemet.com/capedge2/DataSheet?pn=C0603C221J4GAC7867&src-supplier=Avnet, ComponentLink2URL=http://capacitoredge.kemet.com/capedge2/DataSheet?pn=C0603C221J4GAC7867&src-supplier=Avnet, ComponentLink3Description=http://capacitoredge.kemet.com/capedge2/DataSheet?pn=C0603C221J4GAC7867&src-supplier=Avnet+Europe, ComponentLink3URL=http://capacitoredge.kemet.com/capedge2/DataSheet?pn=C0603C221J4GAC7867&src-supplier=Avnet+Europe, ComponentLink4Description=https://datasheet.octopart.com/C0603C221J4GAC7867-KEMET-datasheet-157246123.pdf?src-supplier=Electro+Sonic, ComponentLink4URL=https://datasheet.octopart.com/C0603C221J4GAC7867-KEMET-datasheet-157246123.pdf?src-supplier=Electro+Sonic, ComponentLink5Description=https://datasheet.octopart.com/C0603C221J4GAC7867-KEMET-datasheet-84169754.pdf, ComponentLink5URL=https://datasheet.octopart.com/C0603C221J4GAC7867-KEMET-datasheet-84169754.pdf, Construction=Flat, Depth=0.8mm, Height=0.8mm, Lead Free="Lead Free", Length=1.6mm, Manufacturer Part Number=C0603C221J4GAC7867, Mount="Surface Mount", Packaging="Tape and Reel", Pricing 1="1=0.30000, 10=0.20700, 50=0.13780, 100=0.11710, 500=0.08264, 1000=0.07230 (USD)", Radiation Hardening=No, Stock 1=3450, Supplier 1=DigiKey
C10: library part C0805X225J4RECAUTO, "Cap Cer 0805 2.2UF 16V X7R 5%", Manufacturer=KEMET, Category="Ceramic Capacitors", ComponentLink1Description=https://api.kemet.com/component-edge/download/datasheet/C0805X225J4RECAUTO.pdf?src-supplier=Digi-Key, ComponentLink1URL=https://api.kemet.com/component-edge/download/datasheet/C0805X225J4RECAUTO.pdf?src-supplier=Digi-Key, Manufacturer Part Number=C0805X225J4RECAUTO, Pricing 1="1=0.64000, 10=0.45000, 50=0.34040, 100=0.29640, 500=0.21956, 1000=0.18663 (USD)", RoHS=Yes, RoHS Compliant=Yes, Stock 1=1112, Supplier 1=Digi-Key
C11: library part GRM31CR60J227ME11L, "1206 220 uF 6.3 V ±20% Tolernace X5R Multilayer Ceramic Capacitor", Capacitance=220uF, Case Code (Imperial)=1206, Case Code (Metric)=3216, Dielectric=X5R, Manufacturer=Murata, Max Operating Temperature=85°C, Min Operating Temperature=-55°C, Tolerance=20%, Voltage Rating=6.3V, Case/Package=1206, Category="Ceramic Capacitors", ComponentLink1Description=http://www.farnell.com/datasheets/2867879.pdf?src-supplier=Farnell, ComponentLink1URL=http://www.farnell.com/datasheets/2867879.pdf?src-supplier=Farnell, ComponentLink2Description=http://www.farnell.com/datasheets/2867879.pdf?src-supplier=Element14, ComponentLink2URL=http://www.farnell.com/datasheets/2867879.pdf?src-supplier=Element14, ComponentLink3Description=http://search.murata.co.jp/Ceramy/image/img/A01X/G101/ENG/GRM31CR60J227ME11-01.pdf?src-supplier=Digi-Key, ComponentLink3URL=http://search.murata.co.jp/Ceramy/image/img/A01X/G101/ENG/GRM31CR60J227ME11-01.pdf?src-supplier=Digi-Key, ComponentLink4Description=http://search.murata.co.jp/Ceramy/image/img/A01X/partnumbering_e_01.pdf?src-supplier=Digi-Key, ComponentLink4URL=http://search.murata.co.jp/Ceramy/image/img/A01X/partnumbering_e_01.pdf?src-supplier=Digi-Key, ComponentLink5Description=http://www.farnell.com/datasheets/1957826.pdf?src-supplier=Newark, ComponentLink5URL=http://www.farnell.com/datasheets/1957826.pdf?src-supplier=Newark, Length=0.126inch, Manufacturer Part Number=GRM31CR60J227ME11L, Mount="Surface Mount", Packaging="Cut Tape", Pricing 1="1=1.25000, 10=0.99000, 50=0.85820, 100=0.74260, 500=0.56112, 1000=0.49510 (USD)", REACH SVHC="No SVHC", RoHS=Yes, RoHS Compliant=Yes, Stock 1=229285, Supplier 1=Digi-Key, Thickness=0.075inch, Voltage Rating (DC)=6.3V, Width=0.063inch
C12: library part GCM1555C1H1R5JA16D, "Cap Ceramic 1.5pF 50V C0G 5% Pad SMD 0402 125C Automotive T/R", Capacitance=1.5pF, Case Code (Imperial)=0402, Case Code (Metric)=1005, Manufacturer=Murata, Max Operating Temperature=125°C, Min Operating Temperature=-55°C, Ratings=AEC-Q200, Tolerance=5%, Voltage Rating=50V, Case/Package=0402, Category="Ceramic Capacitors", ComponentLink1Description=http://search.murata.co.jp/Ceramy/image/img/A01X/G101/ENG/GCM1555C1H1R5JA16-01.pdf?src-supplier=Digi-Key, ComponentLink1URL=http://search.murata.co.jp/Ceramy/image/img/A01X/G101/ENG/GCM1555C1H1R5JA16-01.pdf?src-supplier=Digi-Key, Manufacturer Part Number=GCM1555C1H1R5JA16D, Mount="Surface Mount", Packaging="Cut Tape", Pricing 1="1=0.10000, 10=0.04700, 50=0.02580, 100=0.02100, 500=0.01502, 1000=0.01180, 2500=0.01072, 5000=0.00987 (USD)", RoHS=Yes, Stock 1=4046, Supplier 1=Digi-Key
C13: library part C0603C101J4GAC7867, "Cap Ceramic 100pF 16V C0G 5% SMD 0603 125°C Paper T/R", Capacitance=100pF, Case/Package=0603, Dielectric=C0G, Dielectric Material=Ceramic, Manufacturer=KEMET, Max Operating Temperature=125°C, Min Operating Temperature=-55°C, Tolerance=5%, Voltage Rating (DC)=16V, Category="Ceramic Capacitors", ComponentLink1Description=http://components.arrow.com/part/dataview/0323_00312687?src-supplier=Arrow+Europe, ComponentLink1URL=http://components.arrow.com/part/dataview/0323_00312687?src-supplier=Arrow+Europe, ComponentLink2Description=http://capacitoredge.kemet.com/capedge2/DataSheet?pn=C0603C101J4GAC7867&src-supplier=Avnet+Europe, ComponentLink2URL=http://capacitoredge.kemet.com/capedge2/DataSheet?pn=C0603C101J4GAC7867&src-supplier=Avnet+Europe, ComponentLink3Description=https://api.kemet.com/component-edge/download/datasheet/C0603C101J4GACTU.pdf?src-supplier=Digi-Key, ComponentLink3URL=https://api.kemet.com/component-edge/download/datasheet/C0603C101J4GACTU.pdf?src-supplier=Digi-Key, ComponentLink4Description=https://search.kemet.com/component-edge/download/datasheet/C0603C101J4GACTU.pdf?src-supplier=Digi-Key, ComponentLink4URL=https://search.kemet.com/component-edge/download/datasheet/C0603C101J4GACTU.pdf?src-supplier=Digi-Key, ComponentLink5Description=http://capacitoredge.kemet.com/capedge2/DataSheet?pn=C0603C101J4GAC7867&src-supplier=Avnet, ComponentLink5URL=http://capacitoredge.kemet.com/capedge2/DataSheet?pn=C0603C101J4GAC7867&src-supplier=Avnet, Construction=Flat, Depth=0.8mm, Height=0.8mm, Lead Free="Lead Free", Length=1.6mm, Manufacturer Part Number=C0603C101J4GAC7867, Mount="Surface Mount", Packaging="Tape and Reel", Pricing 1="1=0.25000, 10=0.17400, 50=0.11580, 100=0.09840, 500=0.06944, 1000=0.06075 (USD)", Radiation Hardening=No, RoHS=Yes, Stock 1=12069, Supplier 1=Digi-Key
C14: library part C0603C100J4GAC7867, "Cap Ceramic 10pF 16V C0G 5% SMD 0603 125°C Paper T/R", Capacitance=10pF, Case/Package=0603, Dielectric=C0G, Dielectric Material=Ceramic, Manufacturer=KEMET, Max Operating Temperature=125°C, Min Operating Temperature=-55°C, Tolerance=5%, Voltage Rating (DC)=16V, Category="Ceramic Capacitors", ComponentLink1Description=http://components.arrow.com/part/dataview/0323_00312750?src-supplier=Arrow+Europe, ComponentLink1URL=http://components.arrow.com/part/dataview/0323_00312750?src-supplier=Arrow+Europe, ComponentLink2Description=http://capacitoredge.kemet.com/capedge2/DataSheet?pn=C0603C100J4GAC7867&src-supplier=Avnet+Europe, ComponentLink2URL=http://capacitoredge.kemet.com/capedge2/DataSheet?pn=C0603C100J4GAC7867&src-supplier=Avnet+Europe, ComponentLink3Description=https://api.kemet.com/component-edge/download/datasheet/C0603C100J4GACTU.pdf?src-supplier=Digi-Key, ComponentLink3URL=https://api.kemet.com/component-edge/download/datasheet/C0603C100J4GACTU.pdf?src-supplier=Digi-Key, ComponentLink4Description=http://capacitoredge.kemet.com/capedge2/DataSheet?pn=C0603C100J4GAC7867&src-supplier=Avnet, ComponentLink4URL=http://capacitoredge.kemet.com/capedge2/DataSheet?pn=C0603C100J4GAC7867&src-supplier=Avnet, Construction=Flat, Depth=0.8mm, Height=0.8mm, Lead Free="Lead Free", Length=1.6mm, Manufacturer Part Number=C0603C100J4GAC7867, Mount="Surface Mount", Packaging="Tape and Reel", Pricing 1="1=0.25000, 10=0.17400, 50=0.11580, 100=0.09840, 500=0.06944, 1000=0.06075 (USD)", Radiation Hardening=No, RoHS=Yes, Stock 1=29408, Supplier 1=Digi-Key
C15: library part CC0603JRX7R7BB224, "0603 0.22 uF 16 V ±5% Tolerance X7R Multilayer Ceramic Capacitor", Capacitance=220nF, Case Code (Imperial)=0603, Case Code (Metric)=1608, Dielectric=X7R, Manufacturer=Yageo, Max Operating Temperature=125°C, Min Operating Temperature=-55°C, Resistor Type=Ceramic, Tolerance=5%, Voltage Rating=16V, Case/Package=0603, Category="Ceramic Capacitors", ComponentLink1Description=http://www.mouser.com/ds/2/447/Yageo_UPY-GP_NP0_16V-to-50V_9-358835.pdf?src-supplier=Mouser, ComponentLink1URL=http://www.mouser.com/ds/2/447/Yageo_UPY-GP_NP0_16V-to-50V_9-358835.pdf?src-supplier=Mouser, ComponentLink2Description=http://components.arrow.com/part/dataview/0323_04166475?src-supplier=Arrow+Europe, ComponentLink2URL=http://components.arrow.com/part/dataview/0323_04166475?src-supplier=Arrow+Europe, ComponentLink3Description=http://www.yageo.com/exep/pages/download/literatures/ProductSelectionGuide%202014_Final_2.pdf?src-supplier=Digi-Key, ComponentLink3URL=http://www.yageo.com/exep/pages/download/literatures/ProductSelectionGuide%202014_Final_2.pdf?src-supplier=Digi-Key, ComponentLink4Description=http://www.yageo.com/documents/recent/UPY-GPHC_X7R_6.3V-to-50V_18.pdf?src-supplier=Digi-Key, ComponentLink4URL=http://www.yageo.com/documents/recent/UPY-GPHC_X7R_6.3V-to-50V_18.pdf?src-supplier=Digi-Key, Depth=0.8mm, Halogen Free="Halogen Free", Lead Free="Lead Free", Length=0.063inch, Manufacturer Part Number=CC0603JRX7R7BB224, Mount="Surface Mount", Packaging="Tape and Reel", Pricing 1="1=0.14000, 10=0.09800, 50=0.05580, 100=0.04620, 500=0.03238, 1000=0.02680 (USD)", RoHS=Yes, RoHS Compliant=Yes, Series=CC, Stock 1=48553, Supplier 1=Digi-Key, Termination=SMD/SMT, Thickness=0.035inch, Voltage Rating (DC)=16V, Weight=7.1E-05oz, Width=0.031inch
C19: library part C1210C475J3NACTU, "1210 C 4.7uF Ceramic Multilayer Capacitor; 25 VDC; +85degC; X8L Dielec; +/-5%", Capacitance=4.7uF, Case Code (Imperial)=1210, Case Code (Metric)=3225, Dielectric=X8L, Dielectric Material=Ceramic, Manufacturer=KEMET, Max Operating Temperature=150°C, Min Operating Temperature=-55°C, Package Quantity=1, Tolerance=5%, Voltage=25V, Case/Package=1210, Category="Ceramic Capacitors", ComponentLink1Description=https://datasheet.ciiva.com/158/kem-c1008-x8l-150c-smd-158325.pdf?src-supplier=Digi-Key, ComponentLink1URL=https://datasheet.ciiva.com/158/kem-c1008-x8l-150c-smd-158325.pdf?src-supplier=Digi-Key, ComponentLink2Description=https://datasheet.ciiva.com/158/kem-c1008-x8l-150c-smd-158326.pdf?src-supplier=Digi-Key, ComponentLink2URL=https://datasheet.ciiva.com/158/kem-c1008-x8l-150c-smd-158326.pdf?src-supplier=Digi-Key, ComponentLink3Description=https://datasheet.ciiva.com/158/kem-c1008-x8l-150c-smd-158327.pdf?src-supplier=Digi-Key, ComponentLink3URL=https://datasheet.ciiva.com/158/kem-c1008-x8l-150c-smd-158327.pdf?src-supplier=Digi-Key, Construction=Flat, Depth=2.5mm, Dissipation Factor=10%, Features="High Temperature", Height=2.5mm, Lead Free="Lead Free", Length=3.2mm, Manufacturer Part Number=C1210C475J3NACTU, Mount="Surface Mount,PCB", Packaging="Tape and Reel", Pricing 1="1=1.07000, 10=0.81000, 50=0.67300, 100=0.57950, 500=0.44866 (USD)", Radiation Hardening=No, REACH SVHC="No SVHC", RoHS=Yes, RoHS Compliant=Yes, Series=C, Stock 1=7987, Supplier 1=Digi-Key, Termination=SMD/SMT, Thickness=0.11inch, Voltage Rating=25V, Voltage Rating (DC)=25V, Width=2.5mm
C20 C23: library part C0603C104J4REC7867, "Cap Cer 0603 0.1UF 16V X7R 5%", Manufacturer=KEMET, Category="Ceramic Capacitors", Manufacturer Part Number=C0603C104J4REC7867, Pricing 1="1=0.16000, 10=0.11300, 50=0.06420, 100=0.05310, 500=0.03724, 1000=0.03083 (USD)", RoHS=No, Stock 1=12000, Supplier 1=Digi-Key
C26: library part C3216X6S1C156M160AC, "Cap Ceramic 15uF 16V X6S 20% SMD 1206 105°C Punched Paper T/R", Capacitance=15uF, Case Code (Imperial)=1206, Case Code (Metric)=3216, Dielectric=X6S, Dielectric Material=Ceramic, Manufacturer=TDK, Max Operating Temperature=105°C, Min Operating Temperature=-55°C, Package Quantity=2000, Tolerance=20%, Voltage Rating=16V, Case/Package=1206, Category="Ceramic Capacitors", ComponentLink1Description=https://datasheet.ciiva.com/14893/tdkmlcccaprange-14893189.pdf?src-supplier=Digi-Key, ComponentLink1URL=https://datasheet.ciiva.com/14893/tdkmlcccaprange-14893189.pdf?src-supplier=Digi-Key, Height=1.6mm, Lead Free="Lead Free", Length=0.126inch, Manufacturer Part Number=C3216X6S1C156M160AC, Mount="Surface Mount", Packaging="Tape and Reel", Pricing 1="1=0.94000, 10=0.71500, 50=0.59400, 100=0.51150, 500=0.39600, 1000=0.34100 (USD)", RoHS=Yes, RoHS Compliant=Yes, Series=C, Stock 1=1775, Supplier 1=Digi-Key, Termination=SMD/SMT, Thickness=0.071inch, Voltage Rating (DC)=16V, Weight=0.000571oz, Width=0.063inch
D1 D2 D3: library part ESDL4151MX4T5G, "15 V Bidirectional Low Capacitance ESD Protection Diode for High Speed Data Lines 15V", Manufacturer="ON Semiconductor", Category="ESD and Circuit Protection ICs", Manufacturer Part Number=ESDL4151MX4T5G, Pricing 1="1=0.49000, 10=0.36900, 100=0.23000, 500=0.15736, 1000=0.12105, 2000=0.10895 (USD)", RoHS=Yes, RoHS Compliant=Yes, Stock 1=6875, Supplier 1=Digi-Key
FB1 FB2: library part BLM18AG601SN1D, "Ferrite Beads Multi-Layer 600Ohm 25% 100MHz 500mA 380mOhm DCR 0603 Automotive Paper T/R", Case Code (Imperial)=0603, Case Code (Metric)=1608, Current Rating=500mA, DC Resistance (DCR)=380mR, Frequency=100MHz, Manufacturer=Murata, Max Operating Temperature=125°C, Min Operating Temperature=-55°C, Package Quantity=1, Tolerance=25%, Case/Package=0603, Category=Inductors, ComponentLink1Description=https://datasheet.ciiva.com/19460/1844766-19460213.pdf?src-supplier=Jameco, ComponentLink1URL=https://datasheet.ciiva.com/19460/1844766-19460213.pdf?src-supplier=Jameco, ComponentLink2Description=https://datasheet.ciiva.com/41449/001172228-da-01-en-drossel-0603-600r-1-6x0-8mm-4000st-41449517.pdf?src-supplier=Conrad, ComponentLink2URL=https://datasheet.ciiva.com/41449/001172228-da-01-en-drossel-0603-600r-1-6x0-8mm-4000st-41449517.pdf?src-supplier=Conrad, ComponentLink3Description=https://datasheet.ciiva.com/29347/442309-da-01-en-chip-drossel-0603-600r-500ma-1-6x0-8mm-29347900.pdf?src-supplier=Conrad, ComponentLink3URL=https://datasheet.ciiva.com/29347/442309-da-01-en-chip-drossel-0603-600r-500ma-1-6x0-8mm-29347900.pdf?src-supplier=Conrad, ComponentLink4Description=https://datasheet.ciiva.com/1466/1756147-1466934.pdf?src-supplier=Element14, ComponentLink4URL=https://datasheet.ciiva.com/1466/1756147-1466934.pdf?src-supplier=Element14, ComponentLink5Description=https://datasheet.ciiva.com/1466/1756147-1466933.pdf?src-supplier=Element14, ComponentLink5URL=https://datasheet.ciiva.com/1466/1756147-1466933.pdf?src-supplier=Element14, ComponentLink6Description=https://datasheet.ciiva.com/1012/l0110s0100blm18a-1012018.pdf?src-supplier=Digi-Key, ComponentLink6URL=https://datasheet.ciiva.com/1012/l0110s0100blm18a-1012018.pdf?src-supplier=Digi-Key, ComponentLink7Description=https://datasheet.ciiva.com/1012/l0110s0100blm18a-1012017.pdf?src-supplier=Digi-Key, ComponentLink7URL=https://datasheet.ciiva.com/1012/l0110s0100blm18a-1012017.pdf?src-supplier=Digi-Key, ComponentLink8Description=https://datasheet.ciiva.com/1012/l0110s0100blm18a-1012019.pdf?src-supplier=Digi-Key, ComponentLink8URL=https://datasheet.ciiva.com/1012/l0110s0100blm18a-1012019.pdf?src-supplier=Digi-Key, ComponentLink9Description=https://datasheet.ciiva.com/16210/l0110s0100blm18a-16210006.pdf?src-supplier=Future+Electronics, ComponentLink9URL=https://datasheet.ciiva.com/16210/l0110s0100blm18a-16210006.pdf?src-supplier=Future+Electronics, ComponentLink10Description=https://datasheet.ciiva.com/3081/l0110s0100blm18a-3081613.pdf?src-supplier=Avnet, ComponentLink10URL=https://datasheet.ciiva.com/3081/l0110s0100blm18a-3081613.pdf?src-supplier=Avnet, Core Material=Ferrite, DC Current=500mA, Depth=0.8mm, Height=0.8mm, Impedance=600R, Lead Free="Lead Free", Length=1.6mm, Manufacturer Part Number=BLM18AG601SN1D, Material=Steel,Ferrite, Max Current Rating=500mA, Max DC Current=500mA, Military Standard=Not, Number of Circuits=1, Number of Lines=1, Number of Pins=2, Packaging="Tape and Reel", Pricing 1="1=0.10000, 10=0.07900, 25=0.07200, 50=0.06480, 100=0.04760, 250=0.03460, 500=0.03170, 1000=0.02738 (USD)", Radiation Hardening=No, REACH SVHC="No SVHC", RoHS=Yes, RoHS Compliant=Yes, Shielding=Unshielded, Supplier 1=Digi-Key, Termination=SMD/SMT, Test Frequency=100MHz, Weight=7.1E-05oz, Width=0.8mm
FB3: library part 74279266, "Ferrite Beads Multi-Layer 1KOhm 25% 100MHz 0.65A 0.6Ohm DCR 0603 T/R", Case Code (Imperial)=0603, Case Code (Metric)=1608, Case/Package=SMD/SMT, Current Rating=200mA, DC Resistance (DCR)=600mR, Inductance=1.8nH, Manufacturer="Wurth Electronics", Max Operating Temperature=125°C, Min Operating Temperature=-55°C, Test Frequency=100MHz, Tolerance=25%, Category="Ferrite Beads and Chips", ComponentLink1Description=https://datasheet.ciiva.com/12395/74279266-221135-12395453.pdf?src-supplier=Mouser, ComponentLink1URL=https://datasheet.ciiva.com/12395/74279266-221135-12395453.pdf?src-supplier=Mouser, ComponentLink2Description=https://datasheet.ciiva.com/14971/74279266-14971192.pdf?src-supplier=Digi-Key, ComponentLink2URL=https://datasheet.ciiva.com/14971/74279266-14971192.pdf?src-supplier=Digi-Key, ComponentLink3Description=https://datasheet.ciiva.com/14634/0900766b801ef1d0-14634816.pdf?src-supplier=Allied+Electronics, ComponentLink3URL=https://datasheet.ciiva.com/14634/0900766b801ef1d0-14634816.pdf?src-supplier=Allied+Electronics, ComponentLink4Description=https://datasheet.ciiva.com/11799/0900766b801ef1d0-11799352.pdf?src-supplier=RSComponents, ComponentLink4URL=https://datasheet.ciiva.com/11799/0900766b801ef1d0-11799352.pdf?src-supplier=RSComponents, ComponentLink5Description=https://datasheet.ciiva.com/23763/74279266-23763009.pdf?src-supplier=Newark, ComponentLink5URL=https://datasheet.ciiva.com/23763/74279266-23763009.pdf?src-supplier=Newark, ComponentLink6Description=https://datasheet.ciiva.com/22711/1705901-22711422.pdf?src-supplier=Element14, ComponentLink6URL=https://datasheet.ciiva.com/22711/1705901-22711422.pdf?src-supplier=Element14, ComponentLink7Description=https://datasheet.ciiva.com/1466/1705901-1466509.pdf?src-supplier=Element14, ComponentLink7URL=https://datasheet.ciiva.com/1466/1705901-1466509.pdf?src-supplier=Element14, ComponentLink8Description=https://datasheet.ciiva.com/48698/001087059-da-01-ml-we-cbf-smd-ferrit-74279266-de-en-48698427.pdf?src-supplier=Conrad, ComponentLink8URL=https://datasheet.ciiva.com/48698/001087059-da-01-ml-we-cbf-smd-ferrit-74279266-de-en-48698427.pdf?src-supplier=Conrad, Core Material=Ferrite, Depth=0.8mm, Height=0.8mm, Impedance=1kR, Lead Free="Lead Free", Length=1.6mm, Manufacturer Part Number=74279266, Max Current Rating=200mA, Max DC Current=200mA, Number of Lines=1, Packaging="Tape and Reel", Pricing 1="1=0.18000, 50=0.17400, 100=0.16000, 500=0.15300, 1000=0.14600, 2000=0.13900 (USD)", REACH SVHC=Unknown, RoHS=Yes, RoHS Compliant=Yes, Series=WE-CBF, Shielding=Unshielded, Supplier 1=Digi-Key, Termination=SMD/SMT, Width=0.8mm
H1: library part 10118194-0001LF, "USB - micro B USB 2.0 Receptacle Connector 5 Position Surface Mount, Right Angle; Through Hole", Color=Black, Current Rating=1.8A, Flammability Rating="UL94 V-0", Insulation Resistance=1GR, Manufacturer="Amphenol FCI", Max Operating Temperature=85°C, Max Voltage Rating (AC)=100V, Min Operating Temperature=-55°C, Package Quantity=9600, Supplier Part Number 1=609-4618-6-ND, Category="USB Connectors", ComponentLink1Description=https://datasheet.ciiva.com/4598/10118194ac-197217-4598807.pdf?src-supplier=Mouser, ComponentLink1URL=https://datasheet.ciiva.com/4598/10118194ac-197217-4598807.pdf?src-supplier=Mouser, ComponentLink2Description=https://datasheet.ciiva.com/26945/getdatasheetpartid-418619-26945695.pdf?src-supplier=Verical, ComponentLink2URL=https://datasheet.ciiva.com/26945/getdatasheetpartid-418619-26945695.pdf?src-supplier=Verical, ComponentLink3Description=https://datasheet.ciiva.com/851/10118194-851110.pdf?src-supplier=Digi-Key, ComponentLink3URL=https://datasheet.ciiva.com/851/10118194-851110.pdf?src-supplier=Digi-Key, ComponentLink4Description=https://datasheet.ciiva.com/851/10118194-851111.pdf?src-supplier=Digi-Key, ComponentLink4URL=https://datasheet.ciiva.com/851/10118194-851111.pdf?src-supplier=Digi-Key, Connector Type=USB,Receptacle, Contact Material="Copper Alloy", Contact Plating=Gold, Depth=5mm, Features=Shielded, Gender=Receptacle, Housing Material=Polymer, Lead Free="Lead Free", Length=8.05mm, Manufacturer Part Number=10118194-0001LF, Mount="Surface Mount,Horizontal", Number of Contacts=5, Number of Ports=1, Number of Terminals/Pins=5, Orientation="Right Angle", Packaging="Tape and Reel", Pitch=0.65mm, Pricing 1="1=0.48000, 10=0.45100, 25=0.38680, 50=0.32860, 100=0.31580, 250=0.28360, 500=0.27070 (USD)", Radiation Hardening=No, RoHS=Yes, Stock 1=87961, Supplier 1=Digi-Key, Termination=Solder
H2 H3: library part PBC01DAAN, "CONN HEADER .100 DUAL STR 2POS", Color=Black, Manufacturer=Sullins, Package Quantity=1, Category=Connectors, ComponentLink1Description=http://www.sullinscorp.com/catalogs/77_PAGE108-109_.100_MALE_HDR.pdf?src-supplier=Digi-Key, ComponentLink1URL=http://www.sullinscorp.com/catalogs/77_PAGE108-109_.100_MALE_HDR.pdf?src-supplier=Digi-Key, ComponentLink2Description=http://www.sullinscorp.com/catalogs/97_Page78-79_HEADER_.100_2.54mm_MALE_BREAKAWAY.pdf?src-supplier=Future+Electronics, ComponentLink2URL=http://www.sullinscorp.com/catalogs/97_Page78-79_HEADER_.100_2.54mm_MALE_BREAKAWAY.pdf?src-supplier=Future+Electronics, Connector Type="Male Pin", Contact Material=Bronze, Contact Mating Length=0.23inch, Contact Plating=Gold, Contact Type="Male Pin", Gender=Male, Height=2.54mm, Housing Color=Black, Housing Material=Plastic, Lead Free="Lead Free", Length=2.54mm, Manufacturer Part Number=PBC01DAAN, Mount="Through Hole", Number of Contacts=2, Number of Positions=2, Number of Rows=2, Packaging=Bulk, Pitch=0.1inch, Pricing 1="1=0.20000, 10=0.18500, 25=0.15800, 50=0.13820, 100=0.12830, 250=0.11344, 500=0.10852 (USD)", RoHS=Yes, RoHS Compliant=Yes, Row Spacing=0.1inch, Stock 1=12443, Supplier 1=Digi-Key, Termination=Solder, Width=5.08mm
H4: library part PRPC003SAAN-RC, "CONN HEADER VERT 3POS 2.54MM", Color=Black, Manufacturer=Sullins, Standard Package=1, Supplier Part Number 1=S1011EC-03-ND, Category="Connectors, Interconnects", ComponentLink1Description=https://media.digikey.com/PDF/Data%20Sheets/Sullins%20PDFs/xRxCzzzSxxN-RC_ST_11635-B.pdf?src-supplier=Digi-Key, ComponentLink1URL=https://media.digikey.com/PDF/Data%20Sheets/Sullins%20PDFs/xRxCzzzSxxN-RC_ST_11635-B.pdf?src-supplier=Digi-Key, Connector Type="Header, Unshrouded, Breakaway", Contact Finish=Gold, Contact Finish Thickness=Flash, Contact Mating Length="0.230\" (5.84mm)", Contact Type="Male Pin", Family="Rectangular Connectors - Headers, Male Pins", Fastening Type=-, Features=-, Manufacturer Part Number=PRPC003SAAN-RC, Mounting Type="Through Hole", Number of Positions=3, Number of Positions Loaded=All, Number of Rows=1, Online Catalog="0.100\" (2.54mm) Pitch Connector Headers", Other Names="S9510E-03  S9510E-03-ND", Packaging=Bulk, Pitch="0.100\" (2.54mm)", Pricing 1="1=0.12, 10=0.109, 25=0.0812, 50=0.0696, 100=0.0673, 250=0.058, 500=0.0557 (USD)", Row Spacing=-, Series=-, Stock 1=19067, Supplier 1=Digi-Key, Termination=Solder